# Altium PCB classyTKL_EC-plate.PcbDoc
Units mm, origin at the board's own origin, x right, y up, seen from the top; angles counter-clockwise.
Board outline 351.66 x 133.83 mm, 2 copper layers (Component Side, Bottom Layer), stack 1.571 mm thick; 45 components, 0 nets, 58 pads, 0 vias.
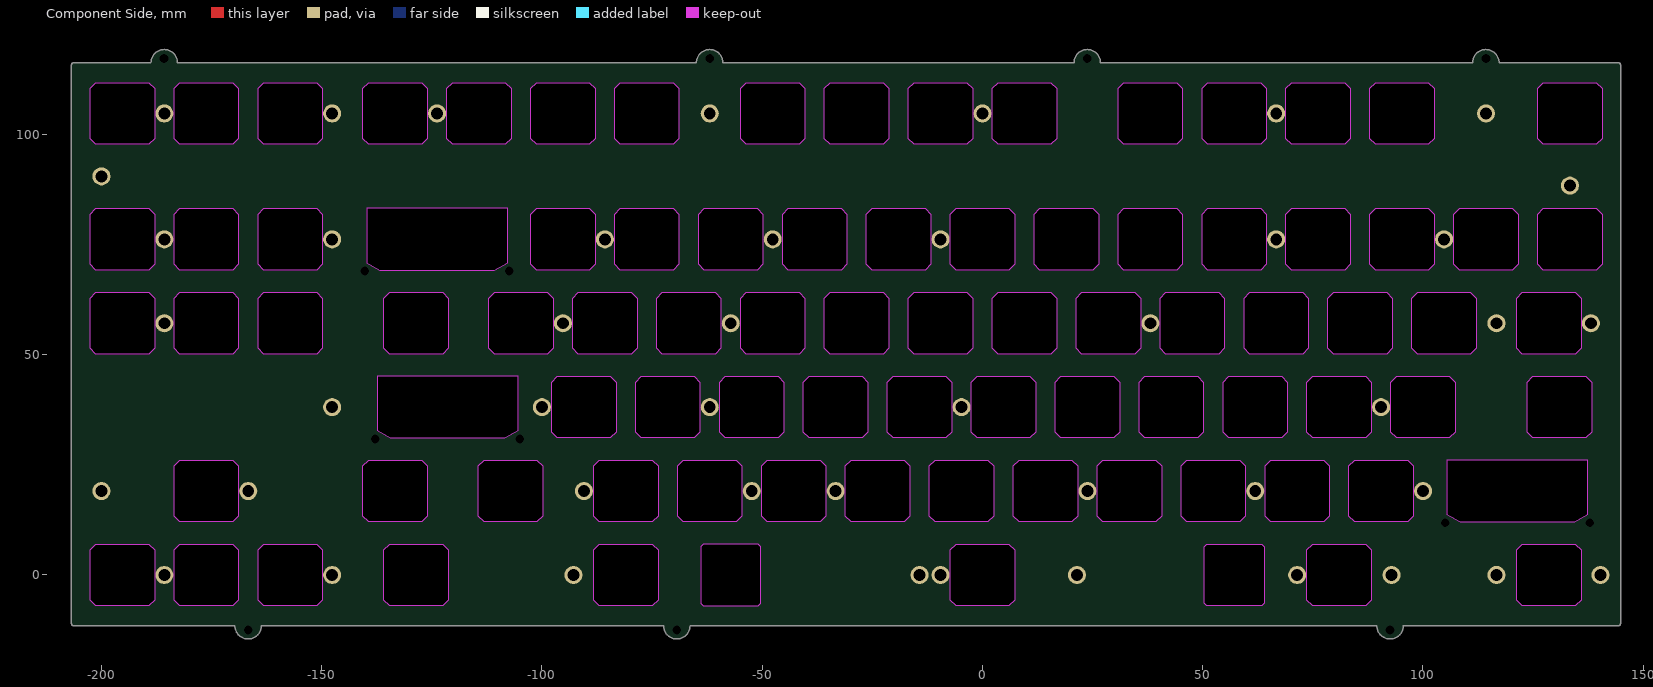
[diagram p0: Component Side view]
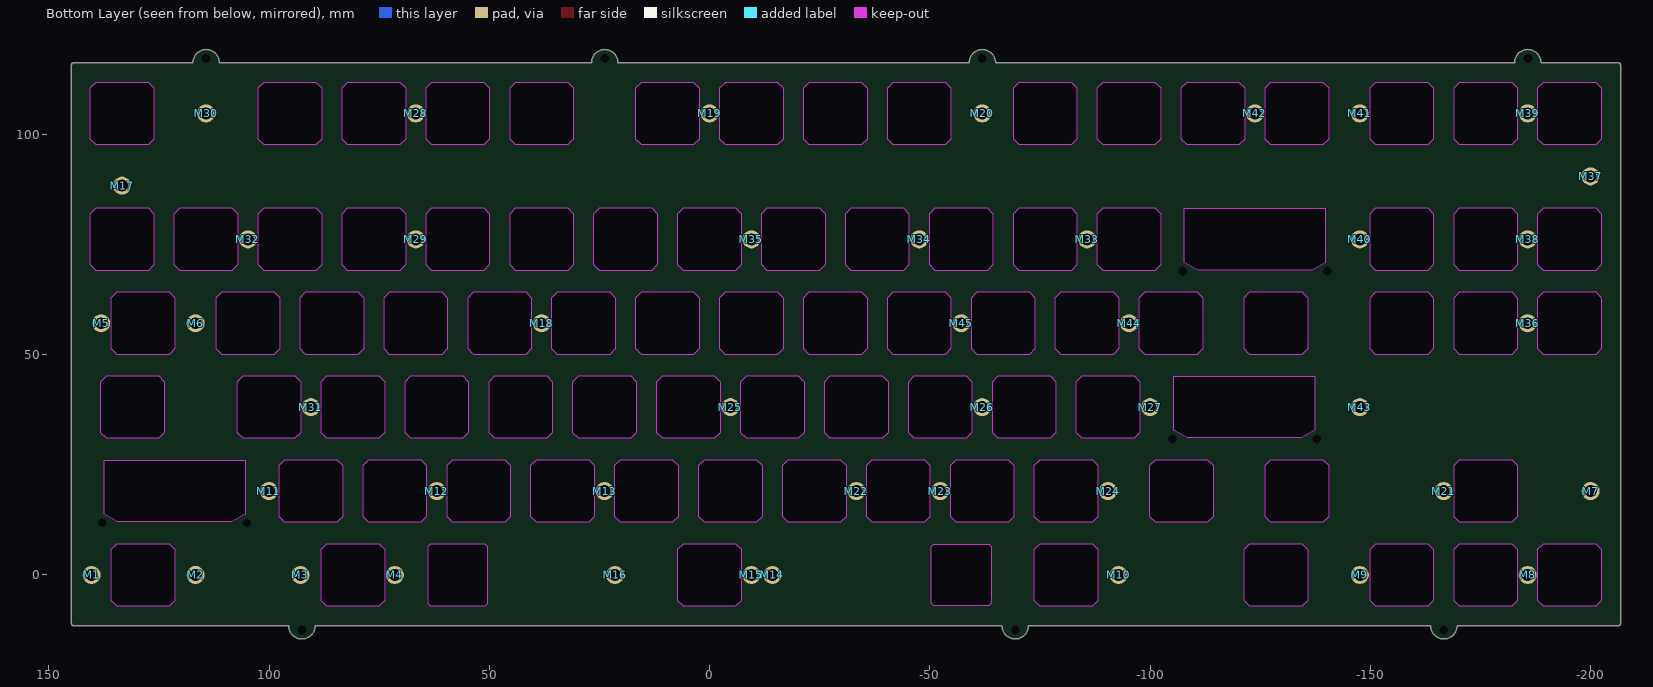
[diagram p1: Bottom Layer view, seen from below]

## Layer stack, top to bottom
Top Solder: solder mask 0.0102, Solder Resist, Dk 3.5
Component Side: signal copper 0.0356
Dielectric 1: core 1.5, FR-4, Dk 4.2
Bottom Layer: signal copper 0.0356
Solder Side: solder mask 0.0102, Solder Resist, Dk 3.5

## Board outline
-169.688,-11.535 ccw(c-166.698,-11.535) -166.698,-14.525 -166.678,-14.525 ccw(c-166.678,-11.535) -163.688,-11.535 -163.688,-11.527 -158.689,-11.535 -158.689,-11.525 -72.363,-11.525 -72.363,-11.535 ccw(c-69.373,-11.535) -69.373,-14.525 -69.353,-14.525 ccw(c-69.353,-11.535) -66.363,-11.535 -66.363,-11.525 89.555,-11.525 89.555,-11.535 ccw(c92.545,-11.535) 92.545,-14.525 92.565,-14.525 ccw(c92.565,-11.535) 95.555,-11.535 95.555,-11.525 96.762,-11.525 102.761,-11.526 102.761,-11.525 144.374,-11.525 ccw(c144.374,-11.025) 144.875,-11.025 144.875,115.8 ccw(c144.374,115.8) 144.374,116.3 117.299,116.3 117.299,116.31 ccw(c114.309,116.31) 114.309,119.3 114.289,119.3 ccw(c114.289,116.31) 111.3,116.31 111.3,116.3 102.761,116.3 96.762,116.31 96.762,116.3 26.812,116.3 26.812,116.31 ccw(c23.822,116.31) 23.822,119.3 23.802,119.3 ccw(c23.802,116.31) 20.812,116.31 20.812,116.3 -58.913,116.3 -58.913,116.31 ccw(c-61.903,116.31) -61.903,119.3 -61.923,119.3 ccw(c-61.923,116.31) -64.913,116.31 -64.913,116.3 -71.539,116.3 -77.539,116.31 -77.539,116.3 -182.738,116.3 -182.738,116.31 ccw(c-185.728,116.31) -185.728,119.3 -185.748,119.3 ccw(c-185.748,116.31) -188.738,116.31 -188.738,116.3 -206.288,116.3 ccw(c-206.288,115.8) -206.788,115.8 -206.788,-11.025 ccw(c-206.288,-11.025) -206.288,-11.525 -169.688,-11.525
cut-out: -139.794,70.932 -136.794,69.2 -110.794,69.2 -107.794,70.932 -107.794,83.201 -139.794,83.201
cut-out: 105.475,13.782 108.475,12.05 134.475,12.05 137.475,13.782 137.475,26.051 105.475,26.051
cut-out: 50.381,-6.441 50.381,6.442 50.889,6.95 63.473,6.95 63.981,6.442 63.981,-6.441 63.473,-6.949 50.889,-6.949
cut-out: -63.919,-6.441 -63.411,-6.949 -50.827,-6.949 -50.319,-6.441 -50.319,6.442 -50.827,6.95 -63.411,6.95 -63.919,6.442
cut-out: -137.413,32.832 -134.413,31.1 -108.413,31.1 -105.413,32.832 -105.413,45.101 -137.413,45.101
cut-out: -88.231,-5.699 -88.231,5.7 -86.93,7.001 -74.932,7.001 -73.631,5.7 -73.631,-5.699 -74.932,-7 -86.93,-7
cut-out: -7.269,-5.699 -7.269,5.7 -5.968,7.001 6.03,7.001 7.331,5.7 7.331,-5.699 6.03,-7 -5.968,-7
cut-out: 73.694,-5.699 73.694,5.7 74.995,7.001 86.993,7.001 88.294,5.7 88.294,-5.699 86.993,-7 74.995,-7
cut-out: 121.319,-5.699 121.319,5.7 122.62,7.001 134.618,7.001 135.919,5.7 135.919,-5.699 134.618,-7 122.62,-7
cut-out: 123.7,32.401 123.7,43.8 125.001,45.101 136.999,45.101 138.3,43.8 138.3,32.401 136.999,31.1 125.001,31.1
cut-out: 73.694,32.401 73.694,43.8 74.995,45.101 86.993,45.101 88.294,43.8 88.294,32.401 86.993,31.1 74.995,31.1
cut-out: 92.744,32.401 92.744,43.8 94.045,45.101 106.043,45.101 107.344,43.8 107.344,32.401 106.043,31.1 94.045,31.1
cut-out: 83.219,13.351 83.219,24.75 84.52,26.051 96.518,26.051 97.819,24.75 97.819,13.351 96.518,12.05 84.52,12.05
cut-out: 64.169,13.351 64.169,24.75 65.47,26.051 77.468,26.051 78.769,24.75 78.769,13.351 77.468,12.05 65.47,12.05
cut-out: 26.069,13.351 26.069,24.75 27.37,26.051 39.368,26.051 40.669,24.75 40.669,13.351 39.368,12.05 27.37,12.05
cut-out: 45.119,13.351 45.119,24.75 46.42,26.051 58.418,26.051 59.719,24.75 59.719,13.351 58.418,12.05 46.42,12.05
cut-out: 54.644,32.401 54.644,43.8 55.945,45.101 67.943,45.101 69.244,43.8 69.244,32.401 67.943,31.1 55.945,31.1
cut-out: 35.594,32.401 35.594,43.8 36.895,45.101 48.893,45.101 50.194,43.8 50.194,32.401 48.893,31.1 36.895,31.1
cut-out: 16.544,32.401 16.544,43.8 17.845,45.101 29.843,45.101 31.144,43.8 31.144,32.401 29.843,31.1 17.845,31.1
cut-out: 7.019,13.351 7.019,24.75 8.32,26.051 20.318,26.051 21.619,24.75 21.619,13.351 20.318,12.05 8.32,12.05
cut-out: -12.031,13.351 -12.031,24.75 -10.73,26.051 1.268,26.051 2.569,24.75 2.569,13.351 1.268,12.05 -10.73,12.05
cut-out: -2.506,32.401 -2.506,43.8 -1.205,45.101 10.793,45.101 12.094,43.8 12.094,32.401 10.793,31.1 -1.205,31.1
cut-out: -21.556,32.401 -21.556,43.8 -20.255,45.101 -8.257,45.101 -6.956,43.8 -6.956,32.401 -8.257,31.1 -20.255,31.1
cut-out: -31.081,13.351 -31.081,24.75 -29.78,26.051 -17.782,26.051 -16.481,24.75 -16.481,13.351 -17.782,12.05 -29.78,12.05
cut-out: -59.656,32.401 -59.656,43.8 -58.355,45.101 -46.357,45.101 -45.056,43.8 -45.056,32.401 -46.357,31.1 -58.355,31.1
cut-out: -40.606,32.401 -40.606,43.8 -39.305,45.101 -27.307,45.101 -26.006,43.8 -26.006,32.401 -27.307,31.1 -39.305,31.1
cut-out: -50.131,13.351 -50.131,24.75 -48.83,26.051 -36.832,26.051 -35.531,24.75 -35.531,13.351 -36.832,12.05 -48.83,12.05
cut-out: -69.181,13.351 -69.181,24.75 -67.88,26.051 -55.882,26.051 -54.581,24.75 -54.581,13.351 -55.882,12.05 -67.88,12.05
cut-out: -88.231,13.351 -88.231,24.75 -86.93,26.051 -74.932,26.051 -73.631,24.75 -73.631,13.351 -74.932,12.05 -86.93,12.05
cut-out: -78.706,32.401 -78.706,43.8 -77.405,45.101 -65.407,45.101 -64.106,43.8 -64.106,32.401 -65.407,31.1 -77.405,31.1
cut-out: -97.756,32.401 -97.756,43.8 -96.455,45.101 -84.457,45.101 -83.156,43.8 -83.156,32.401 -84.457,31.1 -96.455,31.1
cut-out: -114.425,13.351 -114.425,24.75 -113.124,26.051 -101.126,26.051 -99.825,24.75 -99.825,13.351 -101.126,12.05 -113.124,12.05
cut-out: -140.619,13.351 -140.619,24.75 -139.318,26.051 -127.32,26.051 -126.019,24.75 -126.019,13.351 -127.32,12.05 -139.318,12.05
cut-out: -135.856,-5.699 -135.856,5.7 -134.555,7.001 -122.557,7.001 -121.256,5.7 -121.256,-5.699 -122.557,-7 -134.555,-7
cut-out: -164.431,-5.699 -164.431,5.7 -163.13,7.001 -151.132,7.001 -149.831,5.7 -149.831,-5.699 -151.132,-7 -163.13,-7
cut-out: -202.531,-5.699 -202.531,5.7 -201.23,7.001 -189.232,7.001 -187.931,5.7 -187.931,-5.699 -189.232,-7 -201.23,-7
cut-out: -183.481,-5.699 -183.481,5.7 -182.18,7.001 -170.182,7.001 -168.881,5.7 -168.881,-5.699 -170.182,-7 -182.18,-7
cut-out: -183.481,13.351 -183.481,24.75 -182.18,26.051 -170.182,26.051 -168.881,24.75 -168.881,13.351 -170.182,12.05 -182.18,12.05
cut-out: -202.531,51.451 -202.531,62.85 -201.23,64.151 -189.232,64.151 -187.931,62.85 -187.931,51.451 -189.232,50.15 -201.23,50.15
cut-out: -183.481,51.451 -183.481,62.85 -182.18,64.151 -170.182,64.151 -168.881,62.85 -168.881,51.451 -170.182,50.15 -182.18,50.15
cut-out: -164.431,51.451 -164.431,62.85 -163.13,64.151 -151.132,64.151 -149.831,62.85 -149.831,51.451 -151.132,50.15 -163.13,50.15
cut-out: -135.856,51.451 -135.856,62.85 -134.555,64.151 -122.557,64.151 -121.256,62.85 -121.256,51.451 -122.557,50.15 -134.555,50.15
cut-out: -112.044,51.451 -112.044,62.85 -110.743,64.151 -98.745,64.151 -97.444,62.85 -97.444,51.451 -98.745,50.15 -110.743,50.15
cut-out: -92.994,51.451 -92.994,62.85 -91.693,64.151 -79.695,64.151 -78.394,62.85 -78.394,51.451 -79.695,50.15 -91.693,50.15
cut-out: -73.944,51.451 -73.944,62.85 -72.643,64.151 -60.645,64.151 -59.344,62.85 -59.344,51.451 -60.645,50.15 -72.643,50.15
cut-out: -54.894,51.451 -54.894,62.85 -53.593,64.151 -41.595,64.151 -40.294,62.85 -40.294,51.451 -41.595,50.15 -53.593,50.15
cut-out: -35.844,51.451 -35.844,62.85 -34.543,64.151 -22.545,64.151 -21.244,62.85 -21.244,51.451 -22.545,50.15 -34.543,50.15
cut-out: -16.794,51.451 -16.794,62.85 -15.493,64.151 -3.495,64.151 -2.194,62.85 -2.194,51.451 -3.495,50.15 -15.493,50.15
cut-out: 2.256,51.451 2.256,62.85 3.557,64.151 15.555,64.151 16.856,62.85 16.856,51.451 15.555,50.15 3.557,50.15
cut-out: 21.306,51.451 21.306,62.85 22.607,64.151 34.605,64.151 35.906,62.85 35.906,51.451 34.605,50.15 22.607,50.15
cut-out: 40.356,51.451 40.356,62.85 41.657,64.151 53.655,64.151 54.956,62.85 54.956,51.451 53.655,50.15 41.657,50.15
cut-out: 59.406,51.451 59.406,62.85 60.707,64.151 72.705,64.151 74.006,62.85 74.006,51.451 72.705,50.15 60.707,50.15
cut-out: 78.456,51.451 78.456,62.85 79.757,64.151 91.755,64.151 93.056,62.85 93.056,51.451 91.755,50.15 79.757,50.15
cut-out: 97.506,51.451 97.506,62.85 98.807,64.151 110.805,64.151 112.106,62.85 112.106,51.451 110.805,50.15 98.807,50.15
cut-out: 121.319,51.451 121.319,62.85 122.62,64.151 134.618,64.151 135.919,62.85 135.919,51.451 134.618,50.15 122.62,50.15
cut-out: 126.081,70.501 126.081,81.9 127.382,83.201 139.38,83.201 140.681,81.9 140.681,70.501 139.38,69.2 127.382,69.2
cut-out: 107.031,70.501 107.031,81.9 108.332,83.201 120.33,83.201 121.631,81.9 121.631,70.501 120.33,69.2 108.332,69.2
cut-out: 87.981,70.501 87.981,81.9 89.282,83.201 101.28,83.201 102.581,81.9 102.581,70.501 101.28,69.2 89.282,69.2
cut-out: 68.931,70.501 68.931,81.9 70.232,83.201 82.23,83.201 83.531,81.9 83.531,70.501 82.23,69.2 70.232,69.2
cut-out: 49.881,70.501 49.881,81.9 51.182,83.201 63.18,83.201 64.481,81.9 64.481,70.501 63.18,69.2 51.182,69.2
cut-out: 30.831,70.501 30.831,81.9 32.132,83.201 44.13,83.201 45.431,81.9 45.431,70.501 44.13,69.2 32.132,69.2
cut-out: 11.781,70.501 11.781,81.9 13.082,83.201 25.08,83.201 26.381,81.9 26.381,70.501 25.08,69.2 13.082,69.2
cut-out: -7.269,70.501 -7.269,81.9 -5.968,83.201 6.03,83.201 7.331,81.9 7.331,70.501 6.03,69.2 -5.968,69.2
cut-out: -26.319,70.501 -26.319,81.9 -25.018,83.201 -13.02,83.201 -11.719,81.9 -11.719,70.501 -13.02,69.2 -25.018,69.2
cut-out: -45.369,70.501 -45.369,81.9 -44.068,83.201 -32.07,83.201 -30.769,81.9 -30.769,70.501 -32.07,69.2 -44.068,69.2
cut-out: -64.419,70.501 -64.419,81.9 -63.118,83.201 -51.12,83.201 -49.819,81.9 -49.819,70.501 -51.12,69.2 -63.118,69.2
cut-out: -83.469,70.501 -83.469,81.9 -82.168,83.201 -70.17,83.201 -68.869,81.9 -68.869,70.501 -70.17,69.2 -82.168,69.2
cut-out: -102.519,70.501 -102.519,81.9 -101.218,83.201 -89.22,83.201 -87.919,81.9 -87.919,70.501 -89.22,69.2 -101.218,69.2
cut-out: -164.431,70.501 -164.431,81.9 -163.13,83.201 -151.132,83.201 -149.831,81.9 -149.831,70.501 -151.132,69.2 -163.13,69.2
cut-out: -183.481,70.501 -183.481,81.9 -182.18,83.201 -170.182,83.201 -168.881,81.9 -168.881,70.501 -170.182,69.2 -182.18,69.2
cut-out: -202.531,70.501 -202.531,81.9 -201.23,83.201 -189.232,83.201 -187.931,81.9 -187.931,70.501 -189.232,69.2 -201.23,69.2
cut-out: -202.531,99.076 -202.531,110.475 -201.23,111.776 -189.232,111.776 -187.931,110.475 -187.931,99.076 -189.232,97.775 -201.23,97.775
cut-out: -183.481,99.076 -183.481,110.475 -182.18,111.776 -170.182,111.776 -168.881,110.475 -168.881,99.076 -170.182,97.775 -182.18,97.775
cut-out: -164.431,99.076 -164.431,110.475 -163.13,111.776 -151.132,111.776 -149.831,110.475 -149.831,99.076 -151.132,97.775 -163.13,97.775
cut-out: -140.619,99.076 -140.619,110.475 -139.318,111.776 -127.32,111.776 -126.019,110.475 -126.019,99.076 -127.32,97.775 -139.318,97.775
cut-out: -121.569,99.076 -121.569,110.475 -120.268,111.776 -108.27,111.776 -106.969,110.475 -106.969,99.076 -108.27,97.775 -120.268,97.775
cut-out: -102.519,99.076 -102.519,110.475 -101.218,111.776 -89.22,111.776 -87.919,110.475 -87.919,99.076 -89.22,97.775 -101.218,97.775
cut-out: -83.469,99.076 -83.469,110.475 -82.168,111.776 -70.17,111.776 -68.869,110.475 -68.869,99.076 -70.17,97.775 -82.168,97.775
cut-out: -54.894,99.076 -54.894,110.475 -53.593,111.776 -41.595,111.776 -40.294,110.475 -40.294,99.076 -41.595,97.775 -53.593,97.775
cut-out: -35.844,99.076 -35.844,110.475 -34.543,111.776 -22.545,111.776 -21.244,110.475 -21.244,99.076 -22.545,97.775 -34.543,97.775
cut-out: -16.794,99.076 -16.794,110.475 -15.493,111.776 -3.495,111.776 -2.194,110.475 -2.194,99.076 -3.495,97.775 -15.493,97.775
cut-out: 2.256,99.076 2.256,110.475 3.557,111.776 15.555,111.776 16.856,110.475 16.856,99.076 15.555,97.775 3.557,97.775
cut-out: 30.831,99.076 30.831,110.475 32.132,111.776 44.13,111.776 45.431,110.475 45.431,99.076 44.13,97.775 32.132,97.775
cut-out: 49.881,99.076 49.881,110.475 51.182,111.776 63.18,111.776 64.481,110.475 64.481,99.076 63.18,97.775 51.182,97.775
cut-out: 68.931,99.076 68.931,110.475 70.232,111.776 82.23,111.776 83.531,110.475 83.531,99.076 82.23,97.775 70.232,97.775
cut-out: 87.981,99.076 87.981,110.475 89.282,111.776 101.28,111.776 102.581,110.475 102.581,99.076 101.28,97.775 89.282,97.775
cut-out: 126.081,99.076 126.081,110.475 127.382,111.776 139.38,111.776 140.681,110.475 140.681,99.076 139.38,97.775 127.382,97.775

## Design rules (kind name [scope] priority, off if disabled: settings)
Clearance [All] p1: gap=0.2 ignorepadtopadclearanceinfootprint=FALSE except(0: Arc-Hole Track-Hole SMDPad-Hole THPad-Hole Via-Hole Fill-Hole Poly-Hole Region-Hole Text-Hole; 0.254: THPad-THPad THPad-Via THPad-Fill THPad-Poly THPad-Region THPad-Text Via-Via Via-Fill Via-Poly Via-Region Via-Text Fill-Fill Fill-Poly Fill-Region Fill-Text Poly-Poly Poly-Region Poly-Text Region-Region Region-Text Text-Text)
ComponentClearance [InComponent('No Component') And OnLayer('Component Side')] p1: gap=0.254 collisioncheckmode=3 verticalgap=0.254 showdistances=FALSE
DiffPairsRouting DiffPairsRouting_USB [InDifferentialPairClass('All Differential Pairs')] p1: maxlimit=0.254 minlimit=0.203 mostfreqgap=0.203 toplayer_minwidth=0.152 toplayer_maxwidth=0.381 toplayer_prefwidth=0.152 bottomlayer_minwidth=0.152 bottomlayer_maxwidth=0.381 bottomlayer_prefwidth=0.152 maxuncoupledlength=12.7
DiffPairsRouting [All] p2: maxlimit=0.254 minlimit=0.254 mostfreqgap=0.254 toplayer_minwidth=0.381 toplayer_maxwidth=0.381 toplayer_prefwidth=0.381 bottomlayer_minwidth=0.381 bottomlayer_maxwidth=0.381 bottomlayer_prefwidth=0.381 maxuncoupledlength=12.7
HoleSize [All] p1: absolutevalues=TRUE maxlimit=20 minlimit=0.025 maxpercent=80.000 minpercent=20.000
MatchedLengths MatchedLengths_USB_DiffPairs_1 [All] p1: tolerance=0.127 checknetsindiffpair=TRUE checkdiffpairvsdiffpair=FALSE checkxsignals=FALSE checkothers=FALSE
MatchedLengths MatchedLengths_USB_DiffPairs [All] p2: tolerance=0.127 checknetsindiffpair=TRUE checkdiffpairvsdiffpair=FALSE checkxsignals=FALSE checkothers=FALSE
PolygonConnect PolygonConnect_1 [All vs IsVia] p1: connectstyle=Direct reliefconductorwidth=0.254 reliefentries=4 polygonreliefangle="90 Angle" airgapwidth=0.254
PolygonConnect [All] p2: connectstyle=Relief reliefconductorwidth=0.254 reliefentries=4 polygonreliefangle="90 Angle" airgapwidth=0.254
RoutingVias [All] p1: holewidth=0.711 width=1.27 viastyle="Through Hole" minholewidth=0.711 minwidth=1.27 maxholewidth=0.711 maxwidth=1.27
SolderMaskExpansion [All] p1: expansion=0.102 istentingtop=FALSE
Width [All] p1: maxlimit=0.254 minlimit=0.203 preferedwidth=0.254
27 further rules are at their usual default settings.

## Components (designator, comment, footprint, x,y, rotation, side; value= is the part's Value field where it differs from the comment)
M1 "Plug" TH1620CTJ 140.307,0 r180 bottom
M2 "Plug" TH1620CTJ 116.713,0.001 r180 bottom
M3 "Plug" TH1620CTJ 92.9,0 r180 bottom
M4 "Plug" TH1620CTJ 71.469,0 r180 bottom
M5 "Plug" TH1620CTJ 138.143,57.15 r180 bottom
M6 "Plug" TH1620CTJ 116.713,57.15 r180 bottom
M7 "Plug" TH1620CTJ -199.995,19.05 r180 bottom
M8 "Plug" TH1620CTJ -185.707,0 r180 bottom
M9 "Plug" TH1620CTJ -147.608,0 r180 bottom
M10 "Plug" TH1620CTJ -92.838,0 r180 bottom
M11 "Plug" TH1620CTJ 100.044,19.05 r180 bottom
M12 "Plug" TH1620CTJ 61.944,19.05 r180 bottom
M13 "Plug" TH1620CTJ 23.844,19.05 r180 bottom
M14 "Plug" TH1620CTJ -14.257,0 r180 bottom
M15 "Plug" TH1620CTJ -9.494,0 r180 bottom
M16 "Plug" TH1620CTJ 21.462,0 r180 bottom
M17 "Plug" TH1620CTJ 133.381,88.392 r180 bottom
M18 "Plug" TH1620CTJ 38.131,57.15 r180 bottom
M19 "Plug" TH1620CTJ 0.031,104.775 r180 bottom
M20 "Plug" TH1620CTJ -61.882,104.775 r180 bottom
M21 "Plug" TH1620CTJ -166.657,19.05 r180 bottom
M22 "Plug" TH1620CTJ -33.307,19.05 r180 bottom
M23 "Plug" TH1620CTJ -52.357,19.05 r180 bottom
M24 "Plug" TH1620CTJ -90.457,19.05 r180 bottom
M25 "Plug" TH1620CTJ -4.732,38.1 r180 bottom
M26 "Plug" TH1620CTJ -61.882,38.1 r180 bottom
M27 "Plug" TH1620CTJ -99.982,38.1 r180 bottom
M28 "Plug" TH1620CTJ 66.706,104.776 r180 bottom
M29 "Plug" TH1620CTJ 66.706,76.2 r180 bottom
M30 "Plug" TH1620CTJ 114.332,104.775 r180 bottom
M31 "Plug" TH1620CTJ 90.519,38.1 r180 bottom
M32 "Plug" TH1620CTJ 104.807,76.201 r180 bottom
M33 "Plug" TH1620CTJ -85.695,76.2 r180 bottom
M34 "Plug" TH1620CTJ -47.594,76.2 r180 bottom
M35 "Plug" TH1620CTJ -9.494,76.2 r180 bottom
M36 "Plug" TH1620CTJ -185.707,57.15 r180 bottom
M37 "Plug" TH1620CTJ -199.993,90.505 r180 bottom
M38 "Plug" TH1620CTJ -185.707,76.2 r180 bottom
M39 "Plug" TH1620CTJ -185.706,104.776 r180 bottom
M40 "Plug" TH1620CTJ -147.607,76.2 r180 bottom
M41 "Plug" TH1620CTJ -147.607,104.775 r180 bottom
M42 "Plug" TH1620CTJ -123.795,104.775 r180 bottom
M43 "Plug" TH1620CTJ -147.606,38.101 r180 bottom
M44 "Plug" TH1620CTJ -95.22,57.15 r180 bottom
M45 "Plug" TH1620CTJ -57.119,57.15 r180 bottom

## Footprints (in the part's own frame and the unit in brackets; to place one, negate y for a bottom-side part, rotate by r counter-clockwise, add the part's x,y. Pads: shape width x height; smd on the part's side, far side on the other; paste and mask are expansions set on the pad)
TH1620CTJ [mm]
  round 4.1 hole 2.7: 1(0,0)
  body extent -2,-2 2,2, height 0.3

## Part data
M1 M2 M3 M4 M5 M6 M7 M8 M9 M10 M11 M12 M13 M14 M15 M16 M17 M18 M19 M20 M21 M22 M23 M24 M25 M26 M27 M28 M29 M30 M31 M32 M33 M34 M35 M36 M37 M38 M39 M40 M41 M42 M43 M44 M45: LCSC MFG=Sinhoo, LCSC Part #=C3020123, MRF.Part=TH1620CTJ

## Free pads (board coordinates)
  round 1.152 hole 2 unplated paste+0.148 mask+0.148: ""(-185.748,117.275) ""(-166.678,-12.5) ""(-140.194,69) ""(-137.813,30.9) ""(-107.394,69) ""(-105.013,30.9) ""(-69.373,-12.5) ""(-61.903,117.275) ""(23.802,117.275) ""(92.545,-12.5) ""(105.075,11.85) ""(114.309,117.275) ""(137.875,11.85)

## Nets (pads, with @x,y where several pads share a name; then routed paths per layer and width w, separated by ;. In a path a pad name is that pad's centre, name@x,y a point inside that pad or via, vN(x,y) a via of type N, cw(c..) or ccw(c..) an arc to the next point about the centre after c; other vN are vias at no path point)
pads on no net: M1.1 M2.1 M3.1 M4.1 M5.1 M6.1 M7.1 M8.1 M9.1 M10.1 M11.1 M12.1 M13.1 M14.1 M15.1 M16.1 M17.1 M18.1 M19.1 M20.1 M21.1 M22.1 M23.1 M24.1 M25.1 M26.1 M27.1 M28.1 M29.1 M30.1 M31.1 M32.1 M33.1 M34.1 M35.1 M36.1 M37.1 M38.1 M39.1 M40.1 M41.1 M42.1 M43.1 M44.1 M45.1

## Silkscreen, mask and mechanical layers (free items; w line width, h text height)
outline:
  drawing of 754 lines, arcs and shapes, not listed
Mechanical 7:
  drawing of 998 lines, arcs and shapes, not listed
Mechanical 14:
  lines w0.2: -62.372,7.984 cw(c-61.398,7.984) -61.398,8.958 ; -62.344,7.956 -62.344,-5.406 ccw(c-61.232,-5.406) -61.232,-6.518 -53.822,-6.518 ccw(c-53.822,-5.544) -52.848,-5.544 ; -61.386,8.97 -53.834,8.97 cw(c-53.834,7.996) -52.86,7.996 -52.86,-5.532 ; 52.788,7.984 cw(c53.762,7.984) 53.762,8.958 ; 52.816,7.956 52.816,-5.406 ccw(c53.928,-5.406) 53.928,-6.518 61.338,-6.518 ccw(c61.338,-5.544) 62.312,-5.544 ; 53.774,8.97 61.326,8.97 cw(c61.326,7.996) 62.3,7.996 62.3,-5.532 ; -61.312,-5.53 -53.788,-5.53 -53.788,7.97 -61.312,7.97 -61.312,-5.53 ; 53.788,-5.53 61.312,-5.53 61.312,7.97 53.788,7.97 53.788,-5.53
  lines w0.254: -202.311,31.115 -202.311,45.085 -150.114,45.085 -150.114,31.115 -202.311,31.115